# Altium PCB PickNeck_PCB.PcbDoc
Units mm, origin at the board's own origin, x right, y up, seen from the top; angles counter-clockwise.
Board outline 39 x 20 mm, 4 copper layers (Top Layer, POWER, GND, Bottom Layer), stack 0.778 mm thick; 65 components, 55 nets, 267 pads, 92 vias.
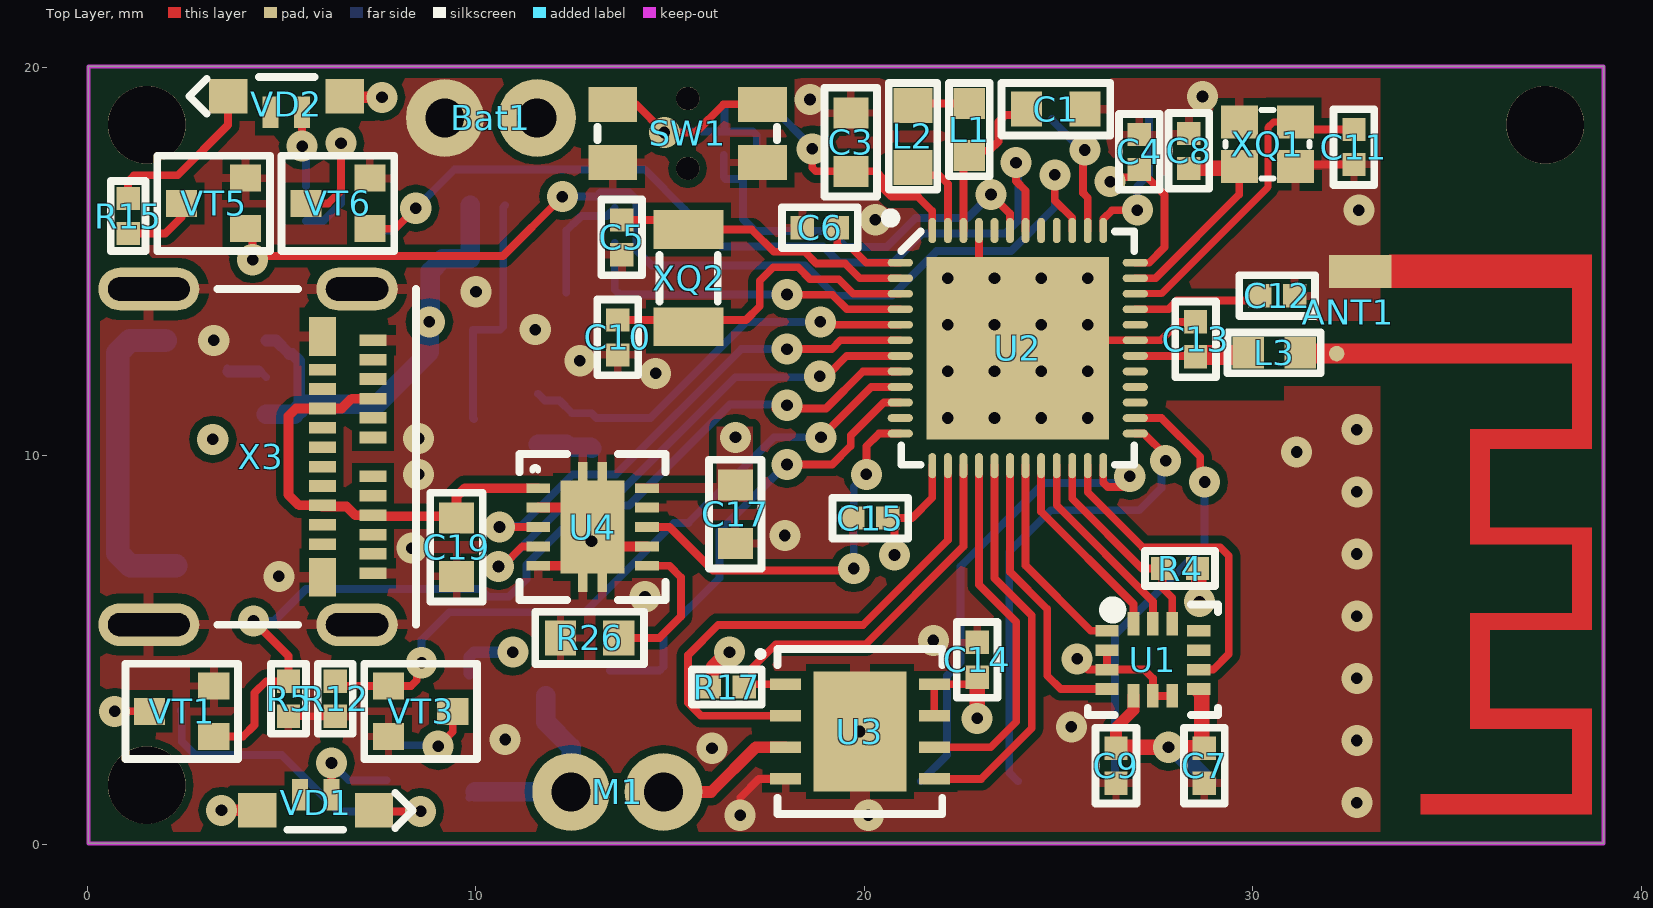
[diagram p0: Top Layer view]
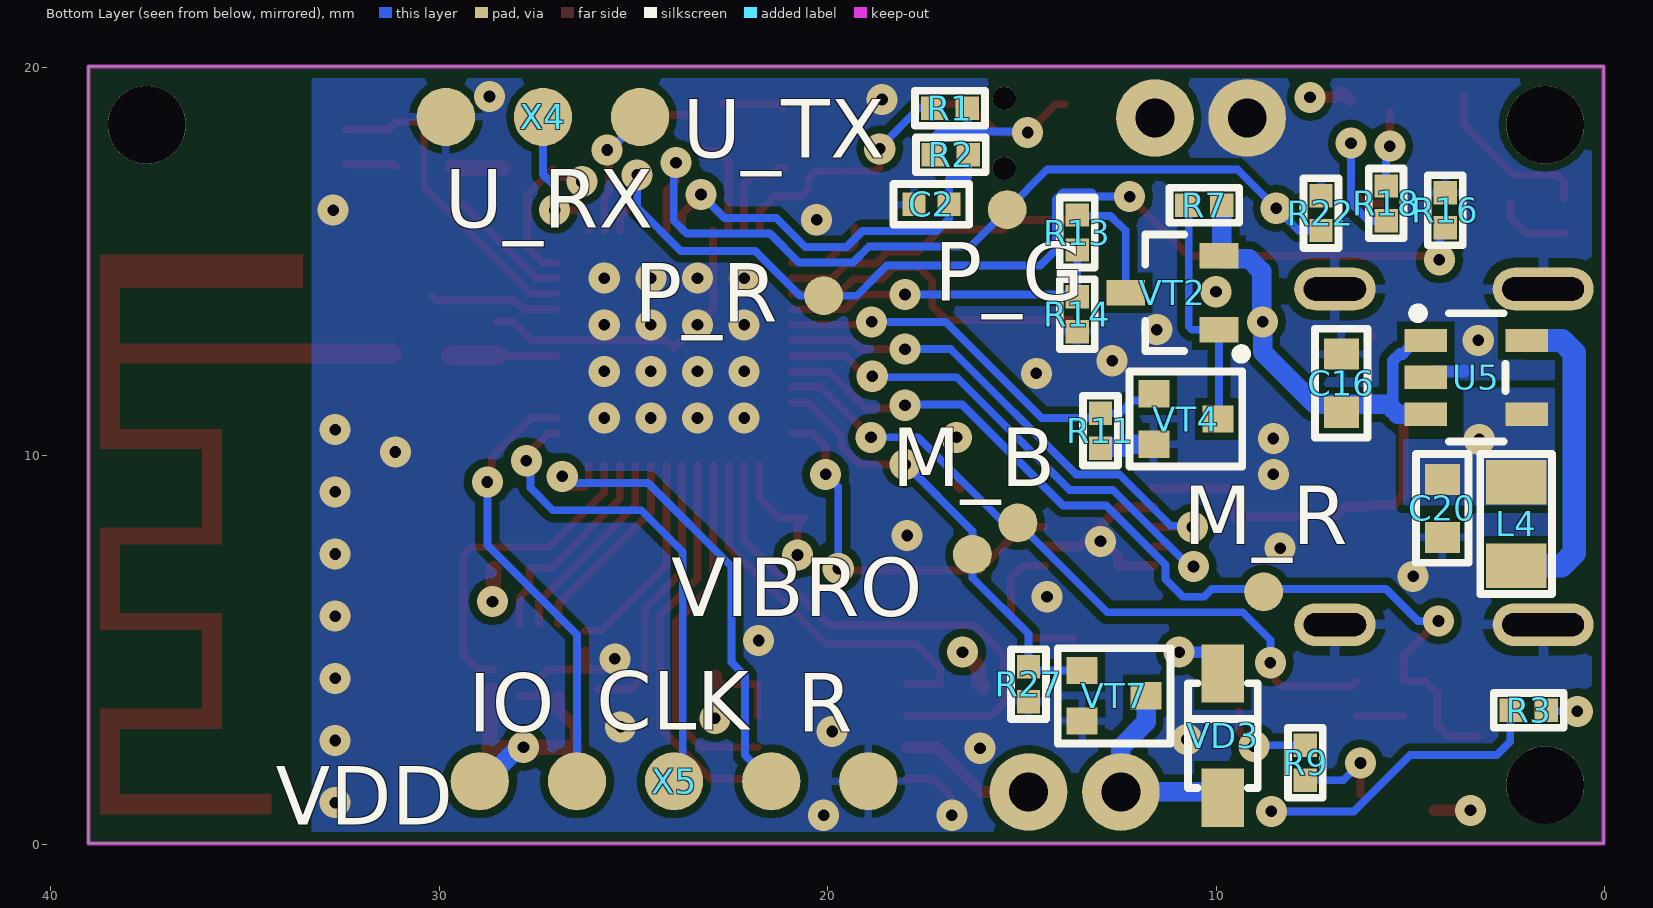
[diagram p1: Bottom Layer view, seen from below]
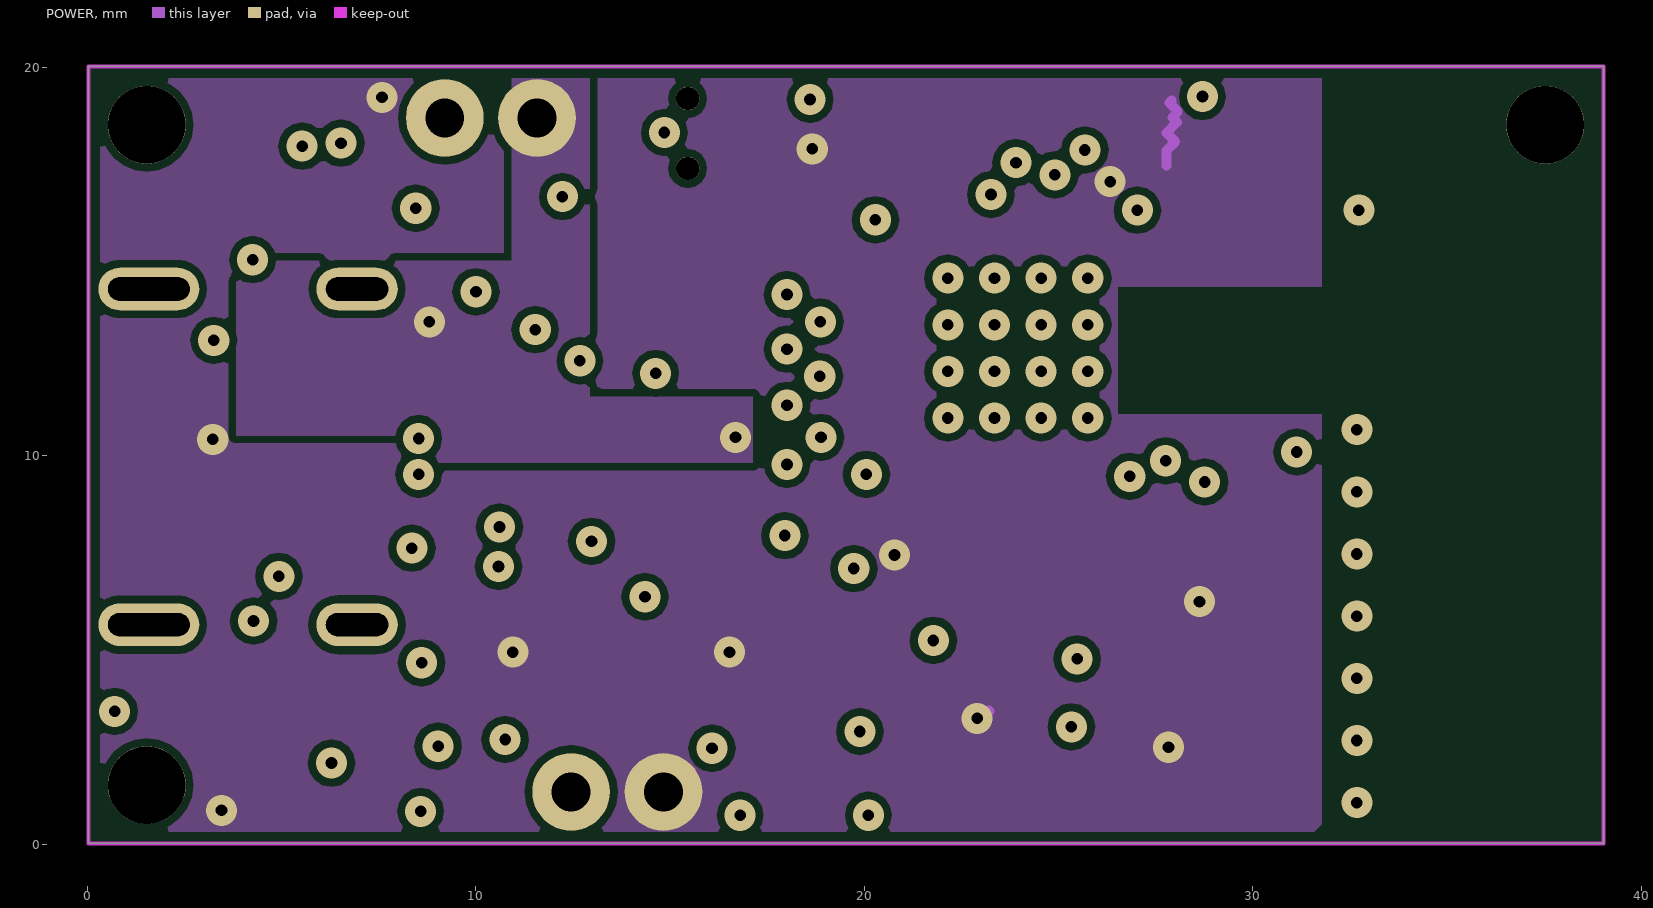
[diagram p2: POWER]
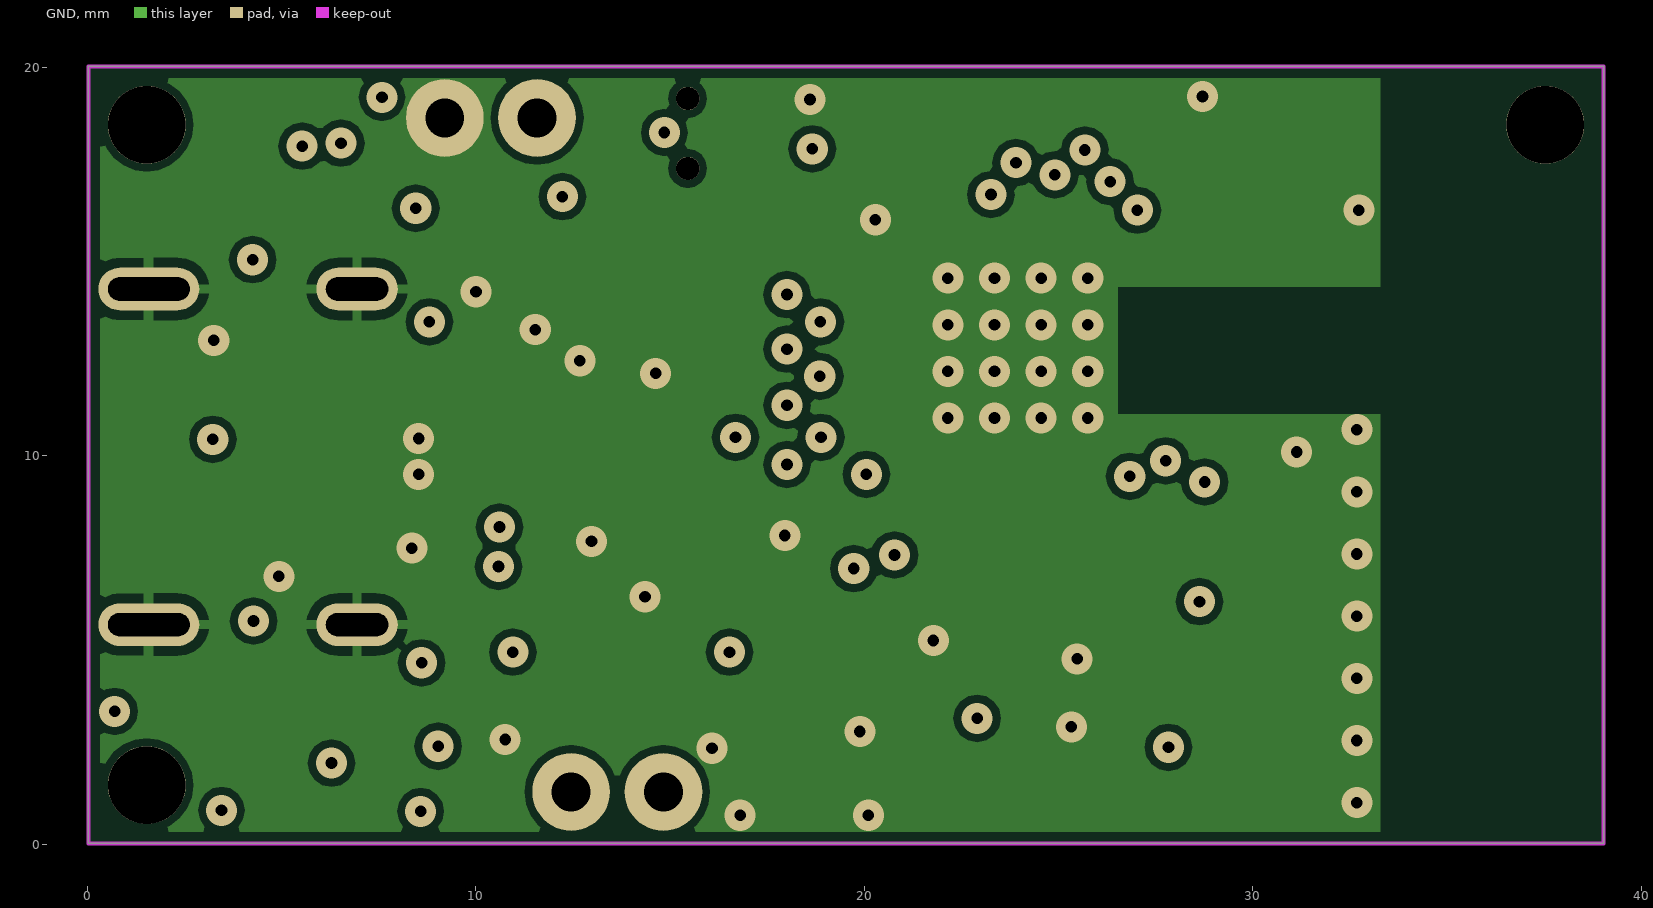
[diagram p3: GND]
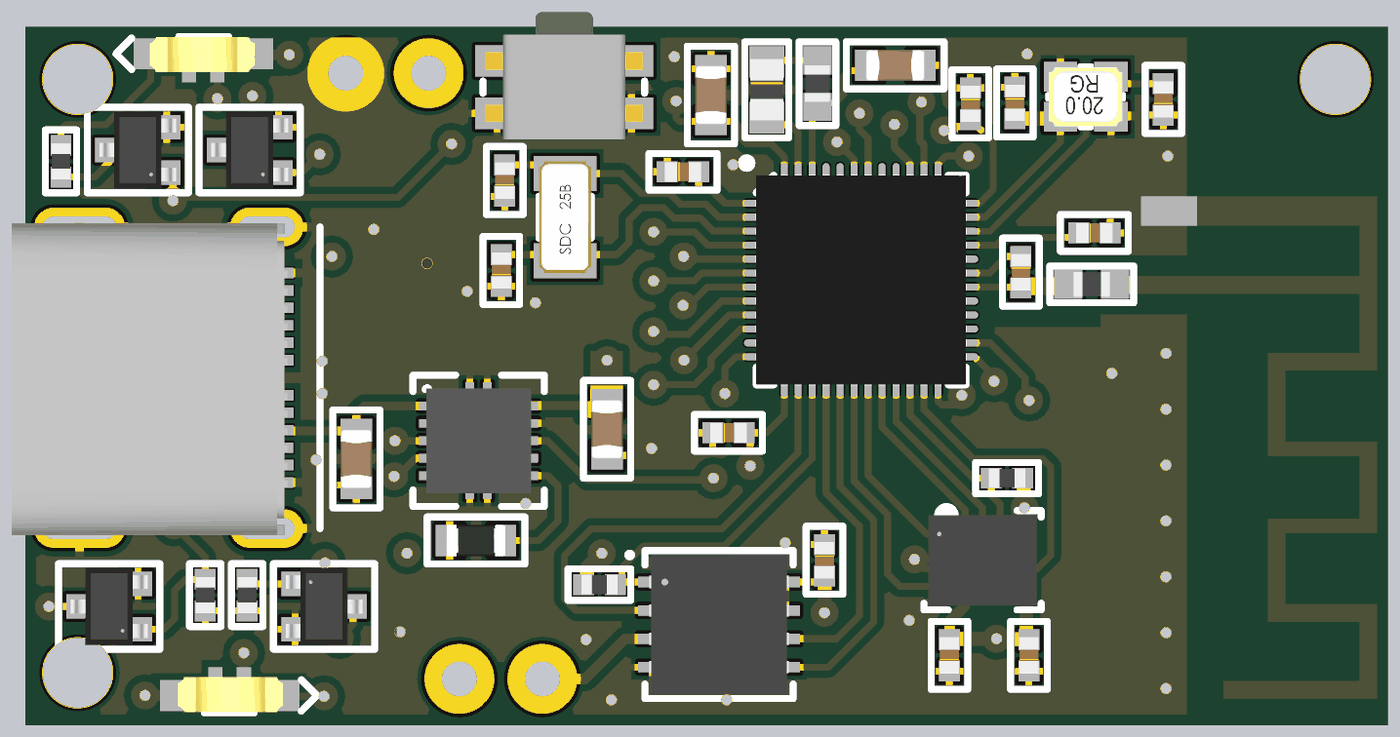
[diagram p4: 3D render of the assembled board from above, using the file's embedded part models]
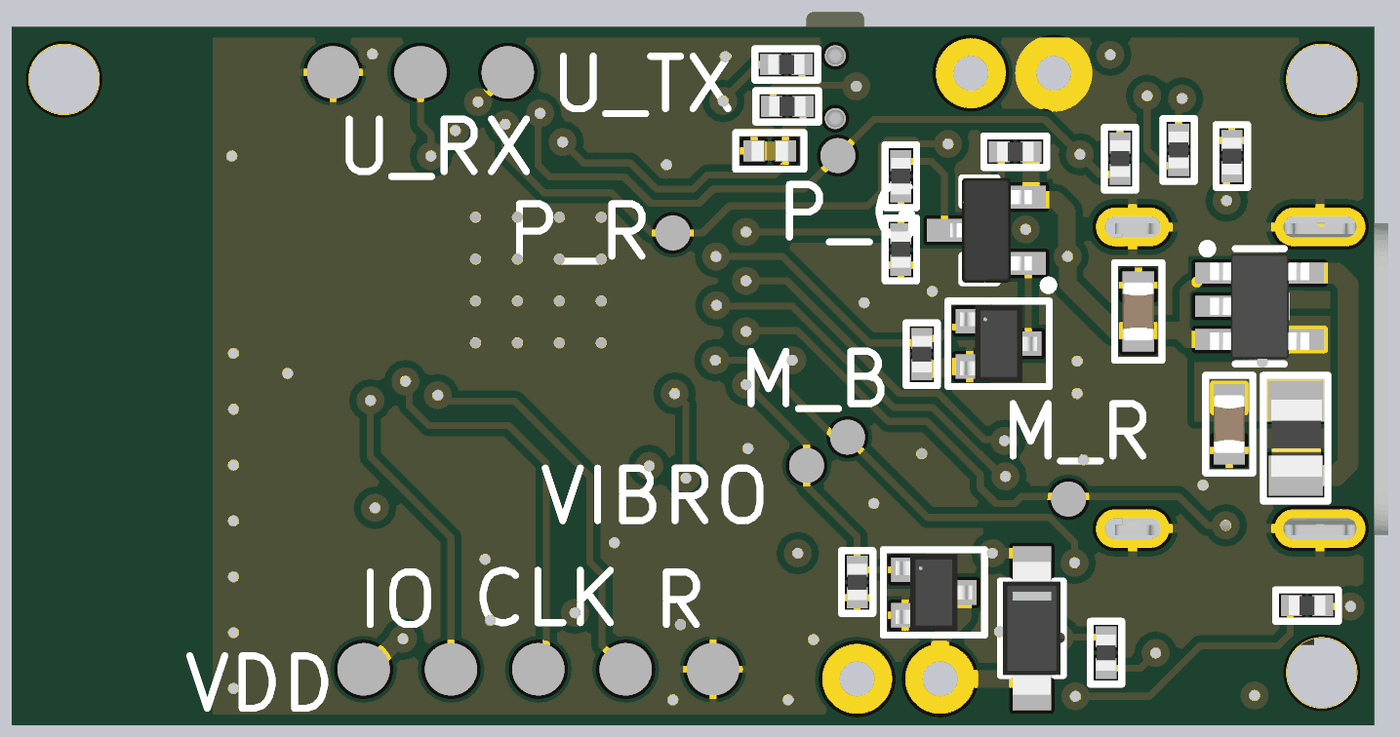
[diagram p5: 3D render of the assembled board from below, using the file's embedded part models]

## Layer stack, top to bottom
Top Solder: solder mask 0.0102, Solder Resist, Dk 3.5
Top Layer: signal copper 0.0356
Dielectric 1: core 0.254, FR-4, Dk 4.2
POWER: signal copper 0.036
Dielectric 2: core 0.254, Dk 4.2
GND: signal copper 0.036
Dielectric 3: prepreg 0.127, Dk 4.2
Bottom Layer: signal copper 0.0356
Bottom Solder: solder mask 0.0102, Solder Resist, Dk 3.5

## Board outline
23.325,0.025 39.025,0.025 39.025,20.025 0.025,20.025 0.025,0.025 5.875,0.025

## Design rules (kind name [scope] priority, off if disabled: settings)
Clearance Clearance_KO [OnLayer('Top Layer')  OR OnLayer('Bottom Layer') vs OnLayer('Keep-Out Layer')] p1: gap=0.25 ignorepadtopadclearanceinfootprint=TRUE except(0: Arc-Hole Track-Hole SMDPad-Hole THPad-Hole Via-Hole Fill-Hole Poly-Hole Region-Hole Text-Hole)
Clearance [All] p2: gap=0.2 ignorepadtopadclearanceinfootprint=TRUE except(0: Arc-Hole Track-Hole SMDPad-Hole THPad-Hole Via-Hole Fill-Hole Poly-Hole Region-Hole Text-Text Text-Hole; 0.15: Arc-SMDPad Track-SMDPad)
ComponentClearance [All] p1: gap=0.1 collisioncheckmode=3 verticalgap=0.2 showdistances=FALSE
MinimumSolderMaskSliver [All] p1: minsoldermaskwidth=0.1
PolygonConnect GND_USB [InNet('GND') vs HasFootprint('1054500101')] p1: thpad.connectstyle=Relief thpad.reliefconductorwidth=0.25 thpad.reliefentries=4 thpad.polygonreliefangle="90 Angle" thpad.airgapwidth=0.25 smdpad.connectstyle=Relief smdpad.reliefconductorwidth=0.25 smdpad.reliefentries=4 smdpad.polygonreliefangle="90 Angle" smdpad.airgapwidth=0.25 via.connectstyle=Direct via.reliefconductorwidth=0.254 via.reliefentries=4 via.polygonreliefangle="90 Angle" via.airgapwidth=0.254
PolygonConnect ANT_GND [InNet('GND') vs HasFootprint('2.4-GHZ INVERTED F ANTENNA - 2 - DUPLICATE') or HasFootprint('BAT')] p2: connectstyle=Direct reliefconductorwidth=0.254 reliefentries=4 polygonreliefangle="90 Angle" airgapwidth=0.254
PolygonConnect THERMALPAD [InNet('GND') vs InPadClass('ThermalPad')] p3: thpad.connectstyle=Relief thpad.reliefconductorwidth=0.5 thpad.reliefentries=4 thpad.polygonreliefangle="90 Angle" thpad.airgapwidth=0.2 smdpad.connectstyle=Relief smdpad.reliefconductorwidth=0.5 smdpad.reliefentries=4 smdpad.polygonreliefangle="90 Angle" smdpad.airgapwidth=0.2 via.connectstyle=Direct via.reliefconductorwidth=0.254 via.reliefentries=4 via.polygonreliefangle="90 Angle" via.airgapwidth=0.254
PolygonConnect GROUNDPOLY [All vs InNet('GND')] p4: thpad.connectstyle=Relief thpad.reliefconductorwidth=0.2 thpad.reliefentries=4 thpad.polygonreliefangle="90 Angle" thpad.airgapwidth=0.2 smdpad.connectstyle=Relief smdpad.reliefconductorwidth=0.2 smdpad.reliefentries=4 smdpad.polygonreliefangle="90 Angle" smdpad.airgapwidth=0.2 via.connectstyle=Direct via.reliefconductorwidth=0 via.reliefentries=4 via.polygonreliefangle="90 Angle" via.airgapwidth=0.254
PolygonConnect PWR_VDD [All] p5: connectstyle=Direct reliefconductorwidth=0.2 reliefentries=4 polygonreliefangle="90 Angle" airgapwidth=0.2
PolygonConnect VBAT [InNet('VBAT')] p6: connectstyle=Direct reliefconductorwidth=0.2 reliefentries=4 polygonreliefangle="90 Angle" airgapwidth=0.2
PolygonConnect all [All] p7: thpad.connectstyle=Relief thpad.reliefconductorwidth=0.2 thpad.reliefentries=4 thpad.polygonreliefangle="90 Angle" thpad.airgapwidth=0.2 smdpad.connectstyle=Relief smdpad.reliefconductorwidth=0.2 smdpad.reliefentries=4 smdpad.polygonreliefangle="90 Angle" smdpad.airgapwidth=0.2 via.connectstyle=Direct via.reliefconductorwidth=0.254 via.reliefentries=4 via.polygonreliefangle="90 Angle" via.airgapwidth=0.254
RoutingVias [All] p1: holewidth=0.3 width=0.8 viastyle="Through Hole" minholewidth=0.3 minwidth=0.7 maxholewidth=4 maxwidth=4
SilkToSilkClearance [All] p1: silktosilkclearance=0.1
SilkToSolderMaskClearance [IsPad] p1: minsilkscreentomaskgap=0.2 clearancetoexposedcopper=TRUE
SolderMaskExpansion [All] p1: expansion=0.1
Width [All] p1: maxlimit=4 minlimit=0.17 preferedwidth=0.3 midlayer1_minwidth=0.254 midlayer1_maxwidth=0.254 midlayer1_prefwidth=0.254 midlayer2_minwidth=0.254 midlayer2_maxwidth=0.254 midlayer2_prefwidth=0.254 bottomlayer_minwidth=0.2 minimp=50.000000 maximp=50.000000 favimp=50.000000
26 further rules are at their usual default settings.

## Classes and differential pairs
pad class ThermalPad: U3-9

## Components (designator, comment, footprint, x,y, rotation, side; value= is the part's Value field where it differs from the comment)
ANT1 "2.4-GHz Inverted F Antenna" "2.4-GHZ INVERTED F ANTENNA - 2 - DUPLICATE" 32.625,7.771 r0 top net-tie
Bat1 "LP502030" BAT 11.572,18.7 r270 top
C1 "1uF" SMD0603CAP 24.924,18.925 r180 top
C2 "0.1uF" SMD0402CAP 17.325,16.474 r180 bottom
C3 "4.7uF" SMD0603CAP 19.649,18.075 r270 top
C4 "0.1uF" SMD0402CAP 27.075,17.825 r270 top
C5 "12pF" SMD0402CAP 13.75,15.625 r90 top
C6 "0.1uF" SMD0402CAP 18.85,15.875 r0 top
C7 "0.1uF" SMD0402CAP 28.75,2.025 r90 top
C8 "12pF" SMD0402CAP 28.35,17.85 r270 top
C9 "0.1uF" SMD0402CAP 26.475,2.025 r90 top
C10 "12pF" SMD0402CAP 13.65,13.05 r90 top
C11 "12pF" SMD0402CAP 32.6,17.95 r90 top
C12 "100pF" SMD0402CAP 30.625,14.125 r0 top
C13 "0.8pF" SMD0402CAP 28.523,13 r270 top
C14 "0.1u" SMD0402CAP 22.9,4.75 r270 top
C15 "0.1uF" SMD0402CAP 20.15,8.4 r0 top
C16 "4.7uF" SMD0603CAP 6.776,11.875 r270 bottom
C17 "0.1uF" SMD0603CAP 16.675,8.5 r90 top
C19 "0.1uF" SMD0603CAP 9.5,7.65 r90 top
C20 "10uF" SMD0603CAP 4.175,8.647 r90 bottom
L1 "15nH" SMD0402IND 22.699,18.4 r90 top
L2 "10uH" SMD0603IND 21.249,18.225 r270 top
L3 "3.9nH" SMD0402IND 30.548,12.65 r0 top
L4 "4.7uH" SMD0805IND 2.249,8.247 r90 bottom
M1 "" VIBRO 14.825,1.35 r270 top
R1 "10k" SMD0402RES 16.85,18.95 r0 bottom
R2 "1k" SMD0402RES 16.826,17.749 r0 bottom
R3 "120" SMD0402RES 1.95,3.45 r180 bottom
R4 "10k" SMD0402RES 28.125,7.1 r0 top
R5 "1M" SMD0402RES 5.176,3.75 r90 top
R7 "1M" SMD0402RES 10.3,16.451 r180 bottom
R9 "36" SMD0402RES 7.7,2.1 r90 bottom
R11 "1M" SMD0402RES 12.975,10.65 r270 bottom
R12 "1М" SMD0402RES 6.376,3.75 r90 top
R13 "3k" SMD0402RES 13.574,15.75 r90 bottom
R14 "2.21k" SMD0402RES 13.574,13.65 r90 bottom
R15 "120" SMD0402RES 1.046,16.175 r270 top
R16 "1M" SMD0402RES 4.1,16.325 r270 bottom
R17 "10k" SMD0402RES 16.458,4.05 r180 top
R18 "36" SMD0402RES 5.622,16.5 r270 bottom
R22 "1M" SMD0402RES 7.3,16.25 r270 bottom
R26 "4.02k" SMD0603RES 12.925,5.315 r0 top
R27 "1M" SMD0402RES 14.825,4.125 r90 bottom
SW1 "KLS7-TS5401" KLS7-TS5401 13.525,19.05 r0 top
U1 "LSM6DSL" LGA-14L 27.425,4.75 r0 top
U2 "nRF52832" QFN40P600X600X90-48N 23.948,12.775 r0 top
U3 "MX25L3206E" USON-8 19.883,2.906 r0 top
U4 "BQ24080" VSON10 13,8.17 r0 top
U5 "LM3670" SOT23-5 3.301,12.023 r180 bottom
VD1 "APFA3010" SMD_LED3010 5.875,0.875 r270 top
VD2 "APFA3010" SMD_LED3010 5.119,19.256 r90 top
VD3 "MBR120" SOD-123 9.825,2.8 r90 bottom
VT1 "BSS816" SOT-323 2.5,3.425 r90 top
VT2 "NTR4101" SOT23-3P 11.124,14.2 r0 bottom
VT3 "BSS816" SOT-323 8.501,3.425 r270 top
VT4 "BSS816" SOT-323 10.85,10.95 r270 bottom
VT5 "BSS816" SOT-323 3.321,16.5 r90 top
VT6 "BSS816" SOT-323 6.522,16.5 r90 top
VT7 "BSS816" SOT-323 12.7,3.825 r270 bottom
X3 "1054500101" 1054500101 3.75,10.025 r270 top
X4 "Value" UART_POINTS 24.825,18.725 r0 bottom
X5 "Value" SWD_POINTS 28.95,1.6 r180 bottom
XQ1 "32MHz" XTAL_2016 30.375,18.025 r180 top
XQ2 "XTAL" XTAL_3215 15.475,14.575 r90 top value=32.768MHz

## Footprints (in the part's own frame and the unit in brackets; to place one, negate y for a bottom-side part, rotate by r counter-clockwise, add the part's x,y. Pads: shape width x height; smd on the part's side, far side on the other; paste and mask are expansions set on the pad)
"2.4-GHZ INVERTED F ANTENNA - 2 - DUPLICATE" [mm]
  rect 1.6x0.847 smd paste+0 mask+0.102: 1(0.137,6.981)
  round 0.4 smd paste-1: 2(-0.47,4.864)
  Top Layer region: 3.472,2.409 3.472,0.377 6.097,0.377 6.097,-2.248 3.472,-2.248 3.472,-4.28 6.097,-4.28 6.097,-6.989 1.694,-6.989 1.694,-6.481 5.589,-6.481 5.589,-4.788 2.964,-4.788 2.964,-1.824 5.589,-1.824 5.589,-0.046 2.964,-0.046 2.964,2.917 5.589,2.917 5.589,4.61 -0.677,4.61 -0.677,5.118 5.589,5.118 5.589,6.558 0.887,6.558 0.887,7.404 6.097,7.404 6.097,2.409
1054500101 [mm]
  oval 1.1x2.1 hole 0.6 slot 1.6 at 90 deg copper offset 0.001,0: A1(-4.271,3.189)
  oval 1.1x2.599 hole 0.6 slot 2.1 at 90 deg copper offset 0.001,0: A1(-4.271,-2.171)
  rect 0.3x0.7 smd mask+0.05: A1(-2.953,3.603) A2(-2.452,3.601) A3(-1.953,3.601) A4(-1.45,3.598) A5(-0.956,3.601) A6(-0.45,3.6) A7(0.55,3.601) A8(1.05,3.6) A9(1.549,3.599) A10(2.052,3.596) A11(2.545,3.599) A12(3.049,3.599) B2(2.297,2.3) B3(1.801,2.296) B4(1.299,2.299) B5(0.8,2.3) B6(0.3,2.302) B7(-0.197,2.301) B8(-0.699,2.301) B9(-1.194,2.297) B10(-1.697,2.301) B11(-2.196,2.302)
  oval 1.1x2.099 hole 0.6 slot 1.6 at 90 deg copper offset -0.001,0: A1(4.369,3.189)
  oval 1.1x2.599 hole 0.6 slot 2.1 at 90 deg copper offset -0.001,0: A1(4.369,-2.171)
  rect 1x0.7 smd mask+0.05: B1(3.149,2.299) B12(-3.051,2.299)
  silkscreen extent -4.27,-0.4 4.37,4.71, body extent -4.38,-4.13 4.56,3.78, height 3.18
BAT [mm]
  round 2 hole 1: 1(0,0) 2(0,-2.375)
KLS7-TS5401 [mm] "TACT BUTTON"
  rect 1.25x0.9 smd: 1(0,0) 2(3.85,0) 3(0,-1.5) 4(3.85,-1.5)
  round 0.6 hole 0.6 unplated: ""(1.925,-1.65) ""(1.925,0.15)
  silkscreen extent -0.4,-0.92 4.23,-0.58, body extent -0.32,-2.25 4.18,1.4, height 1.35
LGA-14L [mm]
  rect 0.6x0.3 smd mask+0.05: 1(-1.181,0.75) 2(-1.181,0.25) 3(-1.181,-0.25) 4(-1.181,-0.75) 8(1.181,-0.75) 9(1.181,-0.25) 10(1.181,0.25) 11(1.181,0.75)
  rect 0.3x0.6 smd mask+0.05: 5(-0.5,-0.927) 6(0,-0.927) 7(0.5,-0.927) 12(0.5,0.927) 13(0,0.927) 14(-0.5,0.927)
  silkscreen extent -1.68,-1.42 1.68,1.46, body extent -1.55,-1.29 1.55,1.3, height 0.87
QFN40P600X600X90-48N [mm]
  oval 0.65x0.2 smd mask+0.05: 1(-3.025,2.2) 2(-3.025,1.8) 3(-3.025,1.4) 4(-3.025,1) 5(-3.025,0.6) 6(-3.025,0.2) 7(-3.025,-0.2) 8(-3.025,-0.6) 9(-3.025,-1) 10(-3.025,-1.4) 11(-3.025,-1.8) 12(-3.025,-2.2) 25(3.025,-2.2) 26(3.025,-1.8) 27(3.025,-1.4) 28(3.025,-1) 29(3.025,-0.6) 30(3.025,-0.2) 31(3.025,0.2) 32(3.025,0.6) 33(3.025,1) 34(3.025,1.4) 35(3.025,1.8) 36(3.025,2.2)
  oval 0.2x0.65 smd mask+0.05: 13(-2.2,-3.025) 14(-1.8,-3.025) 15(-1.4,-3.025) 16(-1,-3.025) 17(-0.6,-3.025) 18(-0.2,-3.025) 19(0.2,-3.025) 20(0.6,-3.025) 21(1,-3.025) 22(1.4,-3.025) 23(1.8,-3.025) 24(2.2,-3.025) 37(2.2,3.025) 38(1.8,3.025) 39(1.4,3.025) 40(1,3.025) 41(0.6,3.025) 42(0.2,3.025) 43(-0.2,3.025) 44(-0.6,3.025) 45(-1,3.025) 46(-1.4,3.025) 47(-1.8,3.025) 48(-2.2,3.025)
  rect 4.7x4.7 smd: 49(0,0)
  silkscreen extent -3.4,-3 3,3.47, body extent -3.02,-3.02 3.02,3.02, height 0.86
SMD0402CAP [mm] "Chip Capacitor, 2-Leads, Body 1,00x0,50mm, IPC Medium Density"
  rect 0.6x0.6 smd: 1(-0.45,0) 2(0.45,0)
  silkscreen extent -0.98,-0.53 0.97,0.53, body extent -0.52,-0.28 0.52,0.28, height 0.56
SMD0402IND [mm]
  rect 0.804x0.811 smd: 1(-0.669,0) 2(0.669,0)
  silkscreen extent -1.2,-0.53 1.2,0.53, body extent -0.52,-0.36 0.52,0.36, height 0.56
SMD0402RES [mm] "Chip Resistor, 2-Leads, Body 1,00x0,50mm, IPC Medium Density"
  rect 0.6x0.6 smd: 1(-0.45,0) 2(0.45,0)
  silkscreen extent -0.9,-0.45 0.9,0.45, body extent -0.52,-0.28 0.52,0.28, height 0.41
SMD0603CAP [mm]
  rect 0.8x0.9 smd: 1(-0.75,0) 2(0.75,0)
  silkscreen extent -1.4,-0.67 1.4,0.68, body extent -0.85,-0.45 0.85,0.45, height 0.9
SMD0603IND [mm]
  rect 0.9x1 smd: 1(-0.8,0) 2(0.8,0)
  silkscreen extent -1.37,-0.63 1.38,0.63, body extent -0.88,-0.47 0.88,0.47, height 0.94
SMD0603RES [mm] "0603 Resistor"
  rect 0.8x0.9 smd: 1(-0.75,0) 2(0.75,0)
  silkscreen extent -1.4,-0.67 1.4,0.67, body extent -0.85,-0.45 0.85,0.45, height 0.55
SMD0805IND [mm]
  rect 1.15x1.55 smd: 1(-1.075,0.025) 2(1.075,0.025)
  silkscreen extent -1.8,-0.9 1.8,0.95, body extent -1.1,-0.72 1.1,0.73, height 1.1
SMD_LED3010 [mil]
  rect 35x39 smd paste+0 mask+0: 1(0,59.06) 2(0,-59.05)
  rect 32x16 smd paste+0 mask+0: 3(-16,-16) 4(-16,16)
  silkscreen extent -18,-29 20,98, body extent -21,-58 19,60, height 58
SOD-123 [mm] "SODFL, 2-Leads, Body 1,65x3,60mm, IPC Medium Density"
  rect 1.5x1.1 smd: 1(-1.6,0) 2(1.6,0)
  silkscreen extent -1.35,-0.9 1.35,0.9, body extent -1.9,-0.83 1.91,0.83, height 1
SOT23-3P [mm] "SOT23, 3-Leads, IPC Medium Density"
  rect 1x0.65 smd: 1(-1.2,0.95) 2(-1.2,-0.95) 3(1.2,0)
  silkscreen extent -1.9,-1.5 0.7,1.7, body extent -1.3,-1.5 1.3,1.5, height 1.1
SOT23-5 [mm]
  rect 1.1x0.6 smd: 1(-1.3,0.95) 2(-1.3,0) 3(-1.3,-0.95) 4(1.3,-0.95) 5(1.3,0.95)
  silkscreen extent -1.63,-1.65 0.75,1.77, body extent -1.42,-1.5 1.42,1.5, height 1.2
SOT-323 [mm]
  rect 0.7x0.8 smd: 1(-0.65,-0.75) 2(0.65,-0.75) 3(0,0.9)
  silkscreen extent -1.22,-1.37 1.22,1.53, body extent -1.1,-1.02 1.1,1.18, height 1
SWD_POINTS [mm]
  round 1.5 smd: 1(0,0.025) 2(2.5,0.025) 3(5,0.025) 4(7.5,0.025) 5(10,0.025)
UART_POINTS [mm]
  round 1.5 smd: 1(0,0) 2(2.5,0) 3(5,0)
USON-8 [mm]
  rect 0.8x0.3 smd: 1(-1.915,1.219) 2(-1.915,0.406) 3(-1.915,-0.406) 6(1.915,-0.406)
  rect 0.8x0.3 smd paste+0: 4(-1.915,-1.219) 5(1.915,-1.219) 7(1.915,0.406) 8(1.915,1.219)
  rect 2.4x3.1 smd: 9(0,0)
  silkscreen extent -2.63,-2.12 2.12,2.12, body extent -1.99,-1.99 1.99,1.99, height 0.61
VIBRO [mm]
  round 2 hole 1: 1(0,0) 2(0,-2.375)
VSON10 [mm]
  rect 0.61x0.25 smd: 1(-1.4,1) 2(-1.4,0.5) 3(-1.4,0) 4(-1.4,-0.5) 5(-1.4,-1) 6(1.4,-1) 7(1.4,-0.5) 8(1.4,0) 9(1.4,0.5) 10(1.4,1)
  rect 0.25x0.5 smd: 11(-0.25,-1.425) 11(-0.25,1.425) 11(0.25,-1.425) 11(0.25,1.425)
  rect 1.651x2.388 smd: 11(0,0)
  Top Layer region: 0,-1.194 0,-1.194 0,-1.194 0,-1.194 0,-1.194 0,-1.194 0,-1.194 0,-1.194
  Top Layer region: 0,1.194 0,1.194 0,1.194 0,1.194 0,1.194 0,1.194 0,1.194 0,1.194
  silkscreen extent -1.88,-1.88 1.88,1.88, body extent -1.5,-1.5 1.5,1.5, height 0.97
XTAL_2016 [mm]
  rect 0.95x0.85 smd: 1(-0.725,-0.575) 2(0.725,-0.575) 3(0.725,0.575) 4(-0.725,0.575)
  silkscreen extent -1.08,-0.88 1.08,0.88, body extent -1.05,-0.85 1.05,0.85, height 0.56
XTAL_3215 [mm]
  rect 1x1.8 smd: 1(-1.25,0) 2(1.25,0)
  silkscreen extent -0.6,-0.75 0.6,0.75, body extent -1.6,-0.75 1.6,0.75, height 0.81

## Part data
ANT1: library part "BLE ANT", "2.4Ghz PCB", Description Doc="2.4Ghz PCB", Type Eng=Antenna, Type Rus=Антенна
Bat1: "Battery connector", Manufacturer="Comfortable Electronic", Footprint Doc=Batteryconnector, Part Number=LP502030, Type Eng=Battery, Type Rus="Элемент питания"
C1: library part CAP_CER_SMD, "Chip Capacitor", Manufacturer=SAMSUNG, Part Number=CL10B105KO8NNNC, Description Doc="CERAMIC 16V X7R", Footprint Doc=0603, Type Eng=Capactior, Type Rus=Конденсатор
C2 C4 C6 C7 C9 C14 C15: library part CAP_CER_SMD, "Chip Capacitor", Manufacturer=YAGEO, Part Number=CC0402KRX7R6BB104, Footprint Doc=0402, Type Eng=Capactior, Type Rus=Конденсатор
  C2 C6 C7 C9 C14 C15: Description Doc="CERAMIC 10V X7R"
  C4: Description Doc="CERAMIC 10V NP0"
C3 C16: library part CAP_CER_SMD, "Chip Capacitor", Manufacturer=SAMSUNG, Part Number=CL10A475KP8NNNC, Footprint Doc=0603, Type Eng=Capactior, Type Rus=Конденсатор
  C3: Description Doc="CERAMIC 10V X5R"
  C16: Description Doc="CERAMIC 16V X7R"
C5 C8 C10 C11: library part CAP_CER_SMD, "Chip Capacitor", Manufacturer=YAGEO, Part Number=CC0402GRNPO9BN120, Footprint Doc=0402, Type Eng=Capactior, Type Rus=Конденсатор
  C5 C8 C11: Description Doc="CERAMIC 50V NP0"
  C10: Description Doc=NP0
C12: library part CAP_CER_SMD, "Chip Capacitor", Manufacturer=YAGEO, Part Number=CC0402JRNPO9BN101, Description Doc="CERAMIC 50V NP0", Footprint Doc=0402, Type Eng=Capactior, Type Rus=Конденсатор
C13: library part CAP_CER_SMD, "Chip Capacitor", Manufacturer=YAGEO, Part Number=CC0402BRNPO9BNR80, Description Doc="CERAMIC 50V NP0", Footprint Doc=0402, Type Eng=Capactior, Type Rus=Конденсатор
C17 C19: library part CAP_CER_SMD, "Chip Capacitor", Manufacturer=YAGEO, Part Number=CC0603KRX7R7BB104, Description Doc="CERAMIC 16V X7R", Footprint Doc=0603, Type Eng=Capactior, Type Rus=Конденсатор
C20: library part CAP_CER_SMD, "Chip Capacitor", Manufacturer=SAMSUNG, Part Number=CL10A106KP8NNNC, Description Doc="CERAMIC 10V X5R", Footprint Doc=0603, Type Eng=Capactior, Type Rus=Конденсатор
L1: library part IND_SMD, "Chip Coil", Manufacturer=TAIYO, Part Number=HK100515NK-T, Description Doc="320mA 100MHz", Footprint Doc=0402, Type Eng=Coil, Type Rus=Индуктивность
L2: library part IND_SMD, "Chip Coil", Manufacturer=TAIYO, Part Number=BRL1608T100M, Description Doc="220mA 45MHz", Footprint Doc=0603, Type Eng=Coil, Type Rus=Индуктивность
L3: library part IND_SMD, "Chip Coil", Manufacturer=BOURNS, Part Number=CW100505-3N9J, Description Doc="0.84A 5800MHz", Footprint Doc=0402, Type Eng=Coil, Type Rus=Индуктивность
L4: library part IND_SMD, "Chip Coil", Manufacturer=TDK, Part Number=MLP2012S4R7M, Description Doc="0.7A 10MHz", Footprint Doc=0805, Type Eng=Coil, Type Rus=Индуктивность
M1: library part Vibromotor, "Vibration motor", Manufacturer=QX-Motor, Part Number=QX-4A, Type Eng="Vibration motor", Type Rus=Вибромотор
R1 R4 R17: library part RES_CHIP_SMD, "Chip Resistor", Manufacturer=YAGEO, Part Number=RC0402JR-0710KL, Description Doc="0.063W 5%", Footprint Doc=0402, Type Eng=Resistor, Type Rus=Резистор
R2: library part RES_CHIP_SMD, "Chip Resistor", Manufacturer=YAGEO, Part Number=RC0402JR-071KL, Description Doc="0.1W 5%", Footprint Doc=0402, Type Eng=Resistor, Type Rus=Резистор
R3 R15: library part RES_CHIP_SMD, "Chip Resistor", Manufacturer=YAGEO, Part Number=RC0402FR-07120RL, Description Doc="0.063W 1%", Footprint Doc=0603, Type Eng=Resistor, Type Rus=Резистор
R5 R7 R11 R12 R16 R22 R27: library part RES_CHIP_SMD, "Chip Resistor", Manufacturer=YAGEO, Part Number=RC0402FR-071ML, Footprint Doc=0402, Type Eng=Resistor, Type Rus=Резистор
  R5 R7 R11 R16 R22 R27: Description Doc="0.063W 1%"
  R12: Description Doc="0.1W 5%"
R9 R18: library part RES_CHIP_SMD, "Chip Resistor", Manufacturer=YAGEO, Part Number=RC0402FR-0736RL, Description Doc="0.063W 1%", Type Eng=Resistor, Type Rus=Резистор
  R9: Footprint Doc=0603
  R18: Footprint Doc=0402
R13: library part RES_CHIP_SMD, "Chip Resistor", Manufacturer=YAGEO, Part Number=RC0402FR-073KL, Description Doc="0.063W 1%", Footprint Doc=0402, Type Eng=Resistor, Type Rus=Резистор
R14: library part RES_CHIP_SMD, "Chip Resistor", Manufacturer=YAGEO, Part Number=RC0402FR-072K21L, Description Doc="0.063W 1%", Footprint Doc=0402, Type Eng=Resistor, Type Rus=Резистор
R26: library part RES_CHIP_SMD, "Chip Resistor", Manufacturer=YAGEO, Part Number=RC0603FR-074K02L, Description Doc="0.1W 1%", Footprint Doc=0603, Type Eng=Resistor, Type Rus=Резистор
SW1: "Button TACT SIDE", Manufacturer=KLS, Part Number=KLS7-TS5401-1.35-250-T, Description Doc="TACT 12V 50mA NO", Footprint Doc=SMD, Type Eng=Button, Type Rus=Кнопка
U1: "Accelerometer", Manufacturer=STMicroelectronics, Footprint Doc=LGA-14, Part Number=LSM6DSL, Type Eng="Integrated circuit", Type Rus=Микросхема
U2: Manufacturer=Nordic, Part Number=nRF52832-QFAA, Footprint Doc=QFAA, Type Eng="Integrated circuit", Type Rus=Микросхема
U3: "Flash memory", Manufacturer="Macronix International", Part Number=MX25L3206EZUI-12G, Footprint Doc=USON-8, Type Eng="Integrated circuit", Type Rus=Микросхема
U4: "Battery charger IC", Manufacturer="TEXAS INSTRUMETNS", Part Number=BQ24080DRC, Footprint Doc=VSON10, Type Eng="Integrated Circuit", Type Rus=Микросхема
U5: "Buck converter", Manufacturer="TEXAS INSTRUMENTS", Part Number=LM3670MF-3.3/NOPB, Footprint Doc=SOT23-5, Type Eng="Integrated circuit", Type Rus=Микросхема
VD1 VD2: library part SMD_RGB, "RGB SMD", Manufacturer=Kingbright, Part Number=APFA3010SEEZGQBDC, Description Doc=RGB_SMD, Footprint Doc=3010_SMD_RGB, Type Eng=LED, Type Rus=Светодиод
VD3: library part SMD_SHOTTKY, "Rectifier Diode", Manufacturer="ON Semiconductor", Part Number=MBR120LSFT1, Description Doc="SHOTTKY 1A 20V", Footprint Doc=SOD-123FL, Type Eng=Diode, Type Rus=Диод
VT1 VT3 VT4 VT5 VT6 VT7: library part N-FET, "N-FET", Manufacturer=Infineon, Part Number=BSS816NW, Description Doc="N-FET 1.4A 20V", Footprint Doc=SOT-323-3, Type Eng=Transistor, Type Rus=Транзистор
VT2: library part P-FET, "P-FET", Manufacturer="ON Semiconductor", Part Number=NTR4101PT1G, Description Doc="P-FET 1.8A 20V", Footprint Doc=SOT23-3, Type Eng=Transistor, Type Rus=Транзистор
X3: library part "USB Type-C", "USB Type-C", Manufacturer=Molex, Footprint Doc=USB-TypeC, Part Number=1054500101, Type Eng=Connector, Type Rus=Разъем
X4: library part RESERV_UART, "Test Point"
X5: library part SWD_CONNECTOR, "Pad for SWD"
XQ1: library part XRCGBxx, "SMD Quartz rezonator", Manufacturer=EPSON, Part Number=Q22FA12800025, Description Doc="8pF, 10ppm", Footprint Doc=XTAL_2016, Type Eng="Quartz resonator", Type Rus="Кварцевый резонатор"
XQ2: Manufacturer=EPSON, Part Number="FC-135 32.768KHz ±20ppm 9pF", Description Doc="9pF, 20ppm", Footprint Doc=XTAL_3215, Type Eng="Quartz resonator", Type Rus="Кварцевый резонатор"

## Free pads (board coordinates)
  round 2 hole 2: ""(1.525,1.525) ""(1.525,18.525) ""(37.525,18.525)
  round 1 smd far side mask+0.1: ""(8.775,6.5) ""(15.1,8.275) ""(16.271,7.464)
  round 1 smd far side paste+0 mask+0.1: ""(15.376,16.34) ""(20.1,14.125)

## Via types
v1: diameter 0.8, hole 0.3, Top Layer to Bottom Layer, tented both sides, 92 vias

## Nets (pads, with @x,y where several pads share a name; then routed paths per layer and width w, separated by ;. In a path a pad name is that pad's centre, name@x,y a point inside that pad or via, vN(x,y) a via of type N, cw(c..) or ccw(c..) an arc to the next point about the centre after c; other vN are vias at no path point)
BAT_ADC: R13.1 R14.2 U2.4 | length 8.4
  Top Layer w0.2: v1@18.006,14.15 19.175,14.15 19.55,13.775 U2.4
  Bottom Layer w0.2: R13.1@13.574,15.48 13.574,14.279 13.7,14.154 v1@17.681,14.154
  other v1: 18.006,14.154
BAT_ADC_EN: R11.1 U2.5 VT4.1 | length 10.2
  Top Layer w0.2: v1@18.864,13.375 U2.5
  Bottom Layer w0.2: VT4.1 11.775,11.425 12.15,11.425 12.475,11.1 R11.1 13.1,10.975 14.49,10.975 16.966,13.45 18.414,13.45
  other v1: 18.864,13.45
CHRG_ST1: U2.6 U4.3 | length 13
  Top Layer w0.2: v1(10.605,8.17) U4.3 ; v1(18.006,12.75) 18.69,12.75 19.156,12.75 19.381,12.975 U2.6
  Bottom Layer w0.2: v1(10.605,8.17) 10.635,8.2 11.169,8.2 12.494,9.525 13.606,9.525 16.831,12.75 v1@17.675,12.75
CHRG_ST2: U2.7 U4.4 | length 13.4
  Top Layer w0.2: v1@10.556,7.153 v1(10.581,7.153) 10.678,7.153 11.195,7.67 U4.4 ; v1(18.85,12.05) 19.022,12.05 19.547,12.575 U2.7
  Bottom Layer w0.2: v1(10.581,7.153) 10.678,7.153 11.325,7.8 11.334,7.8 12.659,9.125 13.772,9.125 16.672,12.025 18.4,12.025
FLASH/CS: R17.1 U2.15 U3.1 | length 10.1
  Top Layer w0.2: U3.1 17.1,4.125 17.1,4.534 17.716,5.15 20.031,5.15 22.548,7.667 U2.15
FLASH/MISO: U2.14 U3.2 | length 13.7
  Top Layer w0.2: U3.2 15.793,3.312 15.458,3.647 15.458,4.873 16.236,5.65 19.965,5.65 22.148,7.833 22.148,9.152 U2.14
FLASH/MOSI: U2.17 U3.5 | length 10.2
  Top Layer w0.2: U3.5 23.004,1.687 24.306,2.989 24.306,5.89 23.348,6.849 U2.17
FLASH/SCK: U2.16 U3.6 | length 9.4
  Top Layer w0.2: U3.6 23.251,2.499 23.906,3.154 23.906,5.725 22.948,6.683 U2.16
GND: ANT1.1 Bat1.2 C1.1 C2.1 C3.1 C4.1 C5.1 C6.1 C7.1 C8.1 C9.1 C10.1 C11.1 C12.2 C13.1 C14.1 C15.1 C16.1 C17.1 C19.1 C20.1 R5.1 R11.2 R12.1 R14.1 R16.1 R22.1 R26.1 R27.1 SW1.3 SW1.4 U1.2 U1.3 U1.6 U1.7 U2.31 U2.45 U2.49 U3.4 U3.9 U4.2 U4.5 U4.7 U4.9 U4.11 U5.2 VT1.2 VT3.2 VT4.2 VT5.2 VT6.2 VT7.2 X3.A1 X3.A12 X3.B1 X3.B12 X4.3 X5.5 XQ1.2 XQ1.4 | length 24.2
  Top Layer w0.2: R5.1 R12.1 ; v1(16.8,0.75) 16.8,1.2 17.287,1.687 U3.4 ; U2.45 22.948,13.775 v1(23.348,13.375) U2.49 24.148,12.975 U2.31 27.625,12.975 28.1,13.45 C13.1 ; v1(25.475,4.775) 25.75,4.5 U1.3 27.2,4.5 27.425,4.275 U1.6 U1.7 ; U1.3@26.244,4.55 U1.2 ; XQ1.4 31.15,17.5 C11.1@32.4,17.5
  Top Layer w0.25: X3.B12@5.999,13.076 X3.B12@6.097,12.978 ; U4.5 12.52,7.17 12.52,7.42 12.75,7.65 12.75,7.92 U4.11@13,8.17 ; U4.2 12.5,8.67 U4.11@13,8.17 ; U4.7 13.5,7.67 U4.11@13,8.17
  Bottom Layer w0.2: 3.6,12.25 3.627,12.223 ; U5.2@4.401,12.223 U5.2
  Bottom Layer w0.3: 3.627,12.173 U5.2@4.401,12.173
  Bottom Layer w0.5: VT4.2 12.325,10.3 12.4,10.225 12.95,10.225 R11.2
  other v1: 20.1,0.75 32.675,1.075 16.075,2.475 32.675,2.675 10.75,2.7 19.883,2.906 25.325,3.025 32.675,4.275 21.775,5.25 32.675,5.875 14.35,6.375 4.925,6.9 32.675,7.475 8.35,7.625 12.975,7.8 17.95,7.95 32.675,9.075 8.525,9.525 31.125,10.1 8.525,10.45 32.675,10.675 22.148,10.975 23.348,10.975 24.548,10.975 25.748,10.975 14.625,12.125 22.148,12.175 23.348,12.175 24.548,12.175 25.748,12.175 12.675,12.45 3.25,12.975 11.525,13.25 22.148,13.375 24.548,13.375 25.748,13.375 10,14.225 22.148,14.575 23.348,14.575 24.548,14.575 25.748,14.575 20.281,16.079 32.725,16.325 18.6,19.175 28.7,19.25
IMU/CS: R4.1 U1.12 U2.22 | length 5.5
  Top Layer w0.2: U2.22 25.348,8.897 27.144,7.1 R4.1 27.675,6.6 27.925,6.35 U1.12
IMU/INT1: U1.4 U2.18 | length 7.2
  Top Layer w0.2: U2.18 23.748,7.014 24.706,6.056 24.706,4.344 25.05,4 25.919,4
IMU/INT2: U1.9 U2.23 | length 8.5
  Top Layer w0.2: U2.23 25.748,9.062 27.16,7.65 29.156,7.65 29.375,7.431 29.375,4.9 28.975,4.5 U1.9
IMU/MISO: U1.1 U2.19 | length 5.4
  Top Layer w0.2: U2.19 24.148,7.18 25.828,5.5 U1.1
IMU/MOSI: U1.14 U2.20 | length 5.1
  Top Layer w0.2: U2.20 24.548,8.565 26.925,6.188 U1.14
IMU/SCL: U1.13 U2.21 | length 5.1
  Top Layer w0.2: U2.21 24.948,8.731 27.425,6.254 U1.13
LED_MEM_B: pad.@15.1,8.275 R12.2 U2.9 VT3.1 | length 18.1
  Top Layer w0.2: R12.2 6.501,4.075 VT3.1 8.325,4.075 8.475,4.225 v1@8.475,4.925 ; v1(18.881,10.478) 20.178,11.775 U2.9
  Bottom Layer w0.2: v1(8.6,4.675) 8.6,5.264 9.311,5.975 12.8,5.975 15.1,8.275 15.467,8.275 17.671,10.478 18.431,10.478
LED_MEM_R: pad.@8.775,6.5 R5.2 U2.8 VT1.1 | length 25
  Top Layer w0.2: VT1.1 4,2.775 4.3,3.075 4.3,3.9 4.6,4.2 R5.2 ; v1(4.275,5.75) 5.175,4.85 R5.2 ; v1@17.703,11.203 17.703,11.22 19.01,11.22 19.965,12.175 U2.8
  Bottom Layer w0.2: v1(4.275,5.75) 4.8,5.75 5.625,6.575 10.11,6.575 10.31,6.375 10.85,6.375 11.3,6.825 11.3,7.2 12.825,8.725 13.938,8.725 16.538,11.325 17.984,11.325 v1(18.006,11.303)
LED_POW_G: pad.@15.376,16.34 R22.2 U2.42 VT6.1 | length 23.5
  Top Layer w0.2: VT6.1 7.925,15.85 v1(8.45,16.375) ; v1(23.9,17.55) 23.9,17.075 24.148,16.827 U2.42
  Bottom Layer w0.2: R22.2 7.874,15.8 v1(8.45,16.375) ; v1@8.425,16.4 v1(8.45,16.375) ; v1(23.9,17.55) 23.956,17.494 23.956,16.056 23.625,15.725 21.483,15.725 20.737,14.979 19.346,14.979 18.936,15.389 16.327,15.389 15.376,16.34 14.341,17.375 9.449,17.375 v1(8.45,16.375)
LED_POW_R: pad.@20.1,14.125 R16.2 U2.39 VT5.1 | length 28.5
  Top Layer w0.2: VT5.1 4.25,15.672 v1(4.25,15.05) 4.346,15.146 10.696,15.146 v1(12.225,16.675) ; v1(24.9,17.236) 24.9,16.575 25.348,16.127 U2.39
  Bottom Layer w0.2: R16.2@4.025,15.8 R16.2 4.25,15.725 v1(4.25,15.05) ; v1(12.225,16.675) 13.095,16.675 13.2,16.78 13.948,16.78 14.124,16.604 14.124,15.301 14.525,14.9 18.475,14.9 19.25,14.125 20.1,14.125 20.708,14.125 21.858,15.275 23.775,15.275 24.9,16.4 v1(24.9,17.236)
NetANT1_2: ANT1.2 L3.2 | length 0.9
  Top Layer w0.508: L3.2 31.232,12.635 ANT1.2
NetC1_2: C1.2 L1.1 U2.46 | length 4.1
  Top Layer w0.2: U2.46 22.548,17.58 L1.1 22.699,17.853 23.213,17.853 23.452,18.092 23.452,18.602 23.626,18.776 C1.2@24.025,18.776
NetC2_2: C2.2 R2.1 U2.43 | length 10.5
  Top Layer w0.2: v1(23.256,16.729) 23.748,16.237 U2.43
  Bottom Layer w0.2: R2.1 16.375,17.175 16.425,17.125 16.875,17.125 C2.2 16.875,16.1 17.186,15.789 19.102,15.789 19.512,15.379 20.571,15.379 21.317,16.125 22.653,16.125 v1(23.256,16.729)
NetC5_2: C5.2 U2.2 XQ2.2 | length 7.8
  Top Layer w0.2: C5.2 15.345,16.075 XQ2.2@15.475,15.945 ; XQ2.2@15.45,15.85 XQ2.2 17.1,15.825 17.671,15.254 18.462,15.254 18.765,14.95 19.506,14.95 19.881,14.575 U2.2
NetC6_2: C6.2 U2.1 | length 2.2
  Top Layer w0.2: C6.2 19.3,15.45 19.4,15.35 19.672,15.35 20.047,14.975 U2.1
NetC8_2: C8.2 U2.35 XQ1.3 | length 5.6
  Top Layer w0.2: U2.35 27.492,14.575 29.65,16.733 XQ1.3
  Top Layer w0.4: C8.2 29.6,17.4 XQ1.3
NetC10_2: C10.2 U2.3 XQ2.1 | length 8.4
  Top Layer w0.2: C10.2@13.75,13.5 16.95,13.5 17.306,13.856 17.306,14.506 17.654,14.854 18.296,14.854 18.6,14.55 19.341,14.55 19.716,14.175 U2.3
NetC11_2: C11.2 U2.34 XQ1.1 | length 8.2
  Top Layer w0.18: U2.34 27.644,14.175 30.385,16.916 30.385,18.46 30.525,18.6 XQ1.1
  Top Layer w0.2: XQ1.1 31.3,18.4 C11.2@32.4,18.4
NetC12_1: C12.1 U2.33 | length 3.3
  Top Layer w0.2: U2.33 27.824,13.775 28.049,14 30.05,14 C12.1
NetC13_2: C13.2 L3.1 U2.30 | length 2.8
  Top Layer w0.2: U2.30 28.248,12.575 C13.2@28.323,12.65 ; C13.2@28.298,12.575 C13.2@28.523,12.575
  Top Layer w0.508: C13.2@28.523,12.575 28.548,12.6 L3.1@29.679,12.6
NetC19_2: C19.2 U4.1 X3.A4 X3.A9 X3.B4 X3.B9 | length 11.6
  Top Layer w0.25: X3.A4@7.298,11.475 6.8,11.475 6.544,11.219 5.369,11.219 5.175,11.025 5.175,9 5.449,8.726 5.999,8.726 6.027,8.699 6.666,8.699 6.889,8.476 7.299,8.476 7.327,8.448 C19.2@9.5,8.448 ; C19.2 C19.2@9.5,8.448 ; U4.1 9.72,9.17 9.5,8.95 C19.2@9.5,8.448
NetL1_2: L1.2 L2.1 | length 1.6
  Top Layer w0.2: L2.1@21.15,18.95 21.268,19.069 L1.2
NetL2_2: L2.2 U2.47 | length 2.4
  Top Layer w0.2: L2.2@21.1,17.425 L2.2 21.449,17.225 21.925,17.225 22.148,17.002 U2.47
NetL4_1: L4.1 U5.5 | length 8.1
  Bottom Layer w0.6: U5.5 1.101,12.973 0.778,12.649 0.778,7.5 1.105,7.172 L4.1
NetM1_2: M1.2 VD3.1 VT7.3 | length 5.6
  Bottom Layer w0.2: VD3.1 VD3.1@9.975,1.35 ; VT7.3@11.7,3.725 VT7.3
  Bottom Layer w0.5: VD3.1@9.975,1.35 M1.2 12.45,2.5 11.8,3.15 VT7.3
NetR1_1: R1.1 R2.2 SW1.1 SW1.2 | length 8
  Top Layer w0.2: SW1.1@13.897,19.05 14.125,19.05 v1(14.85,18.325) 15.65,18.325 16.375,19.05 SW1.2 SW1.2@17.747,19.05
  Bottom Layer w0.2: v1(14.85,18.325) 14.874,18.349 16.35,18.349 ; R1.1 16.4,18.399 16.35,18.349 ; R2.2 17.225,17.8 17.225,18.25 17.126,18.349 16.35,18.349
NetR3_1: R3.1 VD1.1 | length 8.9
  Top Layer w0.2: VD1.1 7.4,0.85 v1(8.575,0.85)
  Bottom Layer w0.2: R3.1 2.425,3.425 2.425,2.65 2.775,2.3 5,2.3 6.45,0.85 v1(8.575,0.85)
NetR3_2: R3.2 VT1.3 | length 1.7
  Top Layer w0.2: v1(0.7,3.425) VT1.3
  Bottom Layer w0.2: v1(0.7,3.425) 1.475,3.425 R3.2
NetR7_1: R7.1 VT2.1 VT4.3 | length 6.3
  Bottom Layer w0.2: VT4.3 9.924,10.976 VT2.1 10.625,13.25 10.7,13.325 10.7,16.401 R7.1
NetR9_1: R9.1 VD1.4 | length 2.4
  Top Layer w0.2: VD1.4 v1(6.281,2.094)
  Bottom Layer w0.2: v1(6.281,2.094) 6.725,1.65 R9.1
NetR9_2: R9.2 VT3.3 | length 2.6
  Top Layer w0.2: v1(9.026,2.526) 9.401,2.901 VT3.3
  Bottom Layer w0.2: R9.2 9.003,2.55 v1(9.026,2.526) v1@9.026,2.276
NetR13_2: R13.2 VT2.3 | length 3.1
  Bottom Layer w0.2: VT2.3 12.324,15.799 12.5,15.975 12.515,15.975 12.715,16.175 13.37,16.175 R13.2@13.574,16.38
NetR15_1: R15.1 VD2.1 | length 4.4
  Top Layer w0.2: R15.1 1.046,17.071 1.2,17.225 2.325,17.225 3.619,18.519 VD2.1
NetR15_2: R15.2 VT5.3 | length 1.9
  Top Layer w0.2: R15.2 2,15.725 2.421,16.146 VT5.3
NetR18_1: R18.1 VD2.3 | length 1.9
  Top Layer w0.2: v1(5.525,17.975) VD2.3
  Bottom Layer w0.2: v1(5.525,17.975) 5.622,17.878 R18.1
NetR18_2: R18.2 VT6.3 | length 4.9
  Top Layer w0.2: VT6.3 6.2,16.5 6.525,16.825 v1(6.525,18.051)
  Bottom Layer w0.2: R18.2 6.075,16.05 6.525,16.5 v1(6.525,18.051)
NetR26_2: R26.2 U4.6 | length 3.8
  Top Layer w0.2: R26.2 14.723,5.315 15.275,5.867 15.275,6.875 14.98,7.17 U4.6
Pow_Good: U2.12 U4.8 | length 10.7
  Top Layer w0.2: U4.8 14.981,8.17 16.101,7.05 20.025,7.05 19.975,7.1 v1(19.725,7.1) ; v1(20.05,9.525) 20.05,10.25 20.375,10.575 U2.12
  Bottom Layer w0.2: v1(19.725,7.1) 19.725,9.2 v1(20.05,9.525)
RESET: U2.24 X5.4 | length 12.5
  Top Layer w0.2: U2.24 26.148,9.317 26.265,9.2 26.714,9.2 26.831,9.317 v1@26.831,9.353
  Bottom Layer w0.2: X5.4 22.128,2.303 22.128,4.346 22.475,4.694 22.475,7.156 24.622,9.303 26.781,9.303 v1@26.831,9.353
  other v1: 26.828,9.475
SWDCLK: U2.25 X5.3 | length 12.5
  Top Layer w0.2: U2.25 27.198,10.575 27.753,10.019 v1(27.753,9.875)
  Bottom Layer w0.2: X5.3 23.725,1.85 23.725,7.531 24.797,8.603 27.071,8.603 27.643,9.175 27.643,9.765 v1(27.753,9.875)
SWDIO: U2.26 X5.2 | length 11.6
  Top Layer w0.2: U2.26 27.643,10.975 28.642,9.977 28.642,9.443 v1(28.757,9.328)
  Bottom Layer w0.2: X5.2@26.6,1.775 X5.2 26.45,5.4 28.757,7.707 v1(28.757,9.328)
UART_RX: U2.37 X4.2 | length 3.8
  Top Layer w0.2: U2.37 26.148,16.098 26.375,16.325 v1(27.025,16.325)
  Bottom Layer w0.2: v1(27.025,16.325) 27.025,16.942 27.325,17.242 X4.2
UART_TX: U2.38 X4.1 | length 3.4
  Top Layer w0.2: v1(25.675,17.875) 25.625,17.825 25.625,16.771 25.748,16.648 U2.38
  Bottom Layer w0.2: X4.1@24.825,18.675 24.825,18.65 25.625,17.85 25.65,17.875 v1(25.675,17.875)
VBAT: Bat1.1 C16.2 C17.2 R7.2 U4.10 U5.1 U5.3 VT2.2 | length 11.9
  Top Layer w0.2: U4.10 U4.10@14.405,9.175
  Top Layer w0.25: C17.2@16.595,9.17 C17.2
  Bottom Layer w0.3: U5.1 4.851,12.973 5.201,12.623 5.275,12.623 5.451,12.447 5.451,11.201 5.323,11.073
  Bottom Layer w0.5: U5.3 5.323,11.073 ; 5.451,11.201 5.575,11.325 7.45,11.325 8.8,12.675 v1(8.8,13.451) 8.825,13.475 8.825,14.75 9.15,15.075 VT2.2@9.849,15.075 ; R7.2 VT2.2@9.85,15.076 ; VT2.2@9.849,15.075 VT2.2@9.85,15.076
  other v1: 16.681,10.478
VDD: C3.2 C4.2 C7.2 C9.2 C14.2 C15.2 C20.2 L4.2 M1.1 R1.2 R4.2 R17.2 U1.5 U1.8 U2.13 U2.36 U2.48 U3.3 U3.7 U3.8 U5.4 VD1.2 VD2.2 VD3.2 X5.1 | length 34.8
  Top Layer w0.2: R17.2@16.046,4.213 R17.2@16.083,4.25 ; v1(18.656,17.904) 18.656,17.419 18.75,17.325 C3.2@19.524,17.325 ; C3.2 20.3,17.325 20.499,17.126 20.499,16.871 20.695,16.675 21.375,16.675 21.748,16.302 U2.48 ; v1(20.775,7.45) 20.775,8.225 C15.2 21.225,8.4 21.748,8.923 U2.13 ; U3.7 U3.8 22.725,4.125 C14.2 ; v1(26.325,17.061) 26.423,17.061 26.461,17.023 26.612,17.175 26.875,17.175 C4.2 27.238,17.213 27.563,16.888 27.725,16.725 27.725,15.373 27.327,14.975 U2.36 ; C9.2 C9.2@26.5,2.5
  Top Layer w0.3: v1(3.45,0.875) VD1.2 ; VD2.2@6.544,19.156 6.762,19.375 6.908,19.229 v1(7.58,19.229) ; v1@10.95,4.925 v1(10.95,4.95) ; M1.1 16.05,1.35 17.199,2.499 U3.3 ; 26.475,2.775 26.475,3 26.925,3.45 U1.5
  Top Layer w0.4: R17.2 16.108,4.15 16.108,4.55 16.35,4.792 v1@16.35,4.9 ; v1(22.9,3.244) C14.2 ; C9.2@26.5,2.5 v1(27.825,2.5) 27.838,2.487 28.712,2.487 28.725,2.5 28.678,2.547 28.678,3.95 U1.8@28.606,3.95 ; R4.2 28.6,7.075 28.6,6.275 v1(28.625,6.25)
  POWER w0.254: v1(20.775,7.45) v1@20.875,7.45 ; v1@23.206,3.444 v1@23.225,3.425 ; 27.773,17.475 27.773,17.859 28,18.087 27.773,18.314 28.05,18.591 27.925,18.715 28.05,18.84 28.025,18.865 28.05,18.89 27.85,19.09 27.91,19.15
  GND w0.254: v1@3.2,10.5 3.225,10.475 v1(3.225,10.425)
  Bottom Layer w0.2: R1.2 17.65,18.95 v1@18.6,18 ; v1(27.825,2.5) v1@27.95,2.5 ; X5.1@28.825,1.625 X5.1
  Bottom Layer w0.3: VD3.2 9.825,4.825 9.95,4.95 v1(10.95,4.95)
  Bottom Layer w0.5: v1@27.95,2.5 X5.1@28.825,1.625
  other v1: 16.526,4.95
Vibro_PWM: pad.@16.271,7.464 R27.2 U2.10 VT7.1 | length 11.7
  Top Layer w0.2: v1(18.006,9.778) 19.171,9.778 19.65,10.257 19.65,10.525 20.5,11.375 U2.10
  Bottom Layer w0.2: VT7.1 14.725,4.475 R27.2 14.825,5.415 16.271,6.861 16.271,7.464 16.271,8.068 v1@17.994,9.791
pads on no net: SW1. U1.10 U1.11 U2.11 U2.27 U2.28 U2.29 U2.32 U2.40 U2.41 U2.44 VD1.3 VD2.4 X3.A2 X3.A3 X3.A5 X3.A6 X3.A7 X3.A8 X3.A10 X3.A11 X3.B2 X3.B3 X3.B5 X3.B6 X3.B7 X3.B8 X3.B10 X3.B11

## Polygon pours and split planes (outlines as drawn)
VBAT on Top Layer "Top Layer-No Net" (solid, remove dead copper, pour order 2): 14.1,9.05 15.9,9.05 15.9,9.025 15.9,8.825 17.125,8.825 17.125,10.75 16.2,10.75 16.2,9.3 14.1,9.3
GND on Top Layer "GND" (solid, remove dead copper, pour order 6): 0.003,20.025 0.003,-0.017 33.275,-0.017 33.275,20.025
VBAT on POWER "Top Layer-No Net" (solid, remove dead copper, pour order 12): 12.925,19.725 10.925,19.725 10.925,15.025 3.825,15.025 3.825,10.525 8.725,10.525 8.725,9.725 8.825,9.825 17.125,9.825 17.125,11.525 12.925,11.525
VDD on POWER "Top Layer-No Net" (solid, remove dead copper, pour order 14): 0.325,19.725 31.775,19.725 31.775,0.525 31.575,0.325 0.325,0.325
VDD on Bottom Layer "VDD" (solid, remove dead copper, pour order 18): 1.2,11.75 3.625,11.75 3.625,10.425 5.175,10.425 5.175,8.725 1.2,8.725
GND on Bottom Layer "GND" (solid, remove dead copper, pour order 20): 0.325,19.725 0.325,0.325 33.275,0.325 33.275,19.725
GND on GND "Top Layer-No Net" (solid, remove dead copper, pour order 16): 0.325,19.725 33.275,19.725 33.275,0.325 0.325,0.325

## Keep-outs
Keep-Out Layer:
  the board outline again, w0.1

## Other copper
Top Layer:
  pour cut-out: 26.3,11.793 33.278,11.793 33.278,13.486 26.3,13.486
  pour cut-out: 30.075,13 30.625,13 30.625,11.994 30.075,11.994
  pour cut-out: 30.8,11.426 26.578,11.426 26.578,14.322 30.8,14.322
POWER:
  pour cut-out: 33.275,11.075 26.525,11.075 26.525,14.35 33.275,14.35
GND:
  pour cut-out: 33.275,14.35 33.275,11.075 26.525,11.075 26.525,14.35

## Silkscreen, mask and mechanical layers (free items; w line width, h text height)
Bottom Overlay:
  text "U_TX" at 23.725,17.675 h1.5
  text "U_RX" at 29.85,15.875 h1.5
  text "P_G" at 17.25,14 h1.5
  text "P_R" at 24.975,13.45 h1.5
  text "M_B" at 18.35,9.225 h1.5
  text "M_R" at 10.85,7.725 h1.5
  text "VIBRO" at 24.025,5.875 h1.5
  text "CLK" at 25.95,2.95 h1.5
  text "R" at 20.775,2.9 h1.5
  text "IO" at 29.25,2.9 h1.5
  text "VDD" at 34.2,0.5 h1.5
Mechanical 3 (Mech3):
  the board outline again, w0.2